# EAGLE board logic (EAGLE 9.6.2)
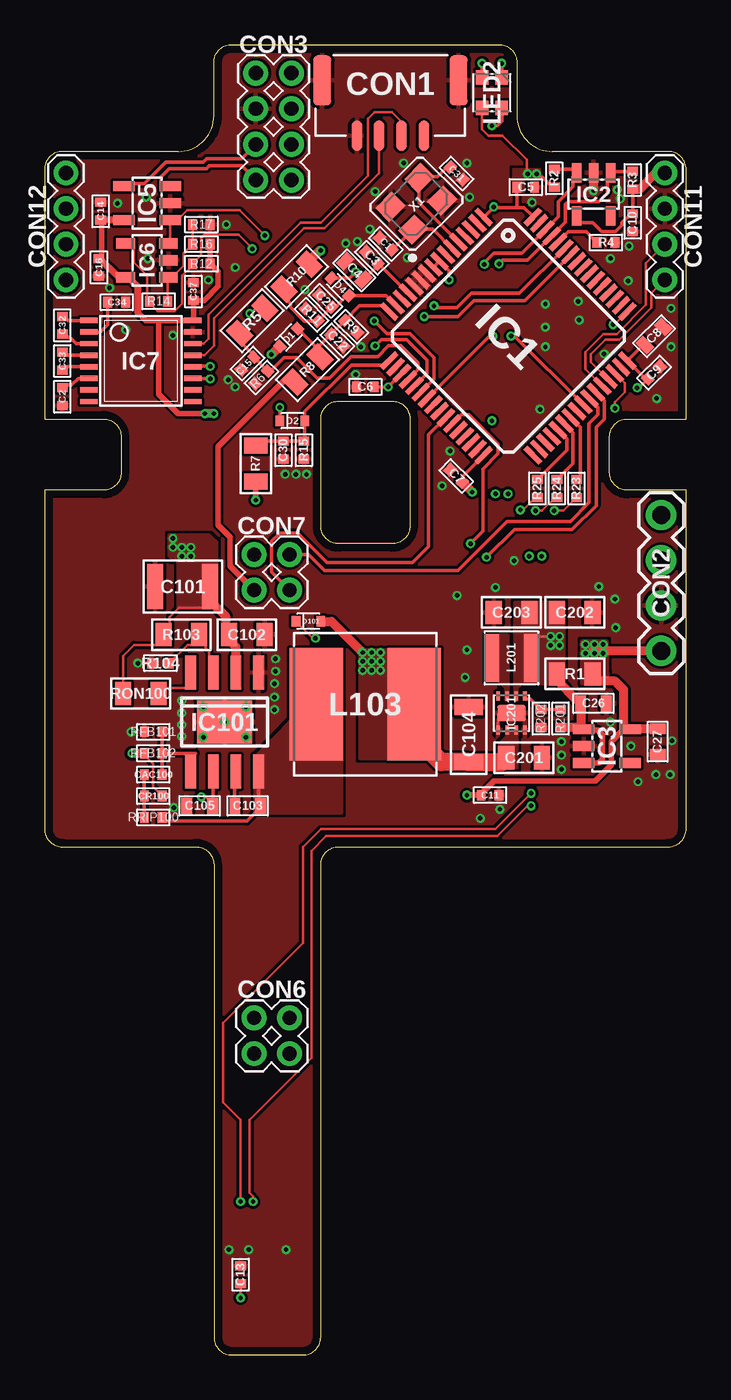
[diagram p0: board, top side]
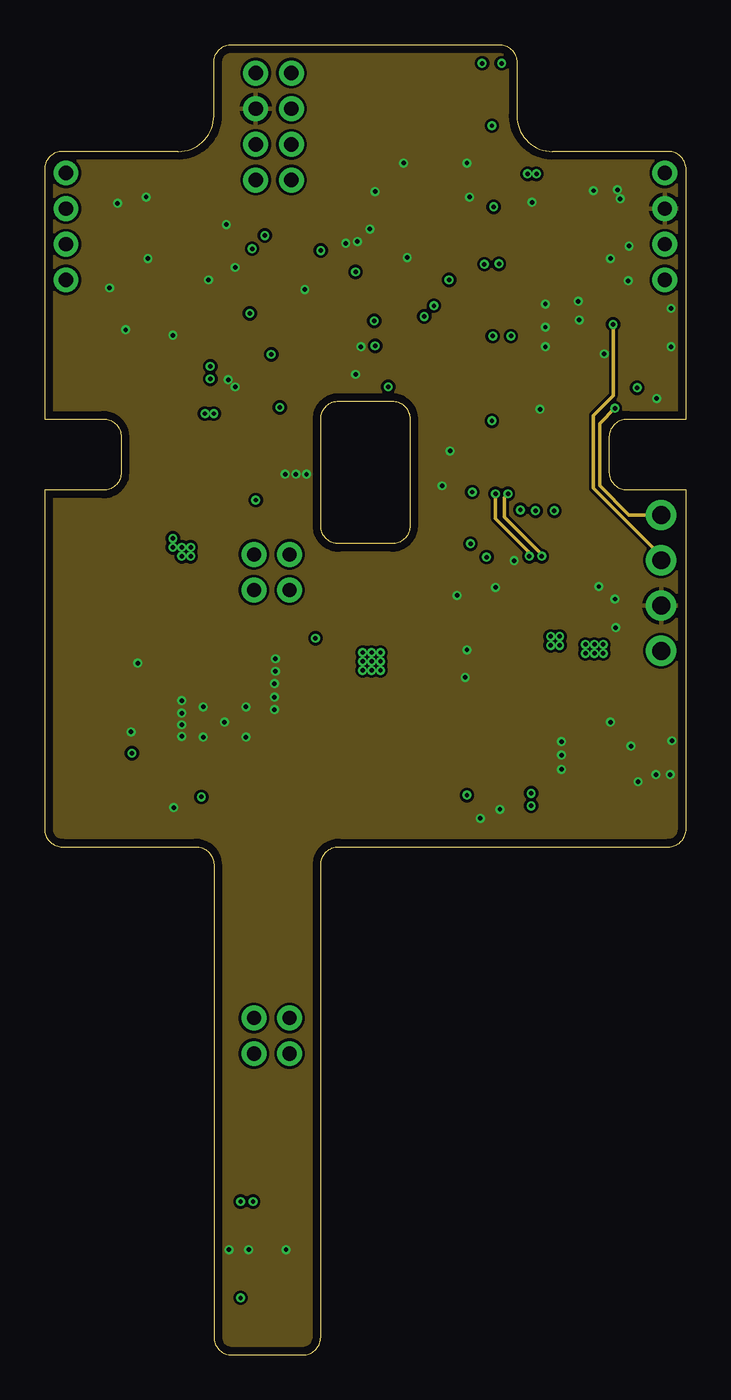
[diagram p1: board, inner layer GND]
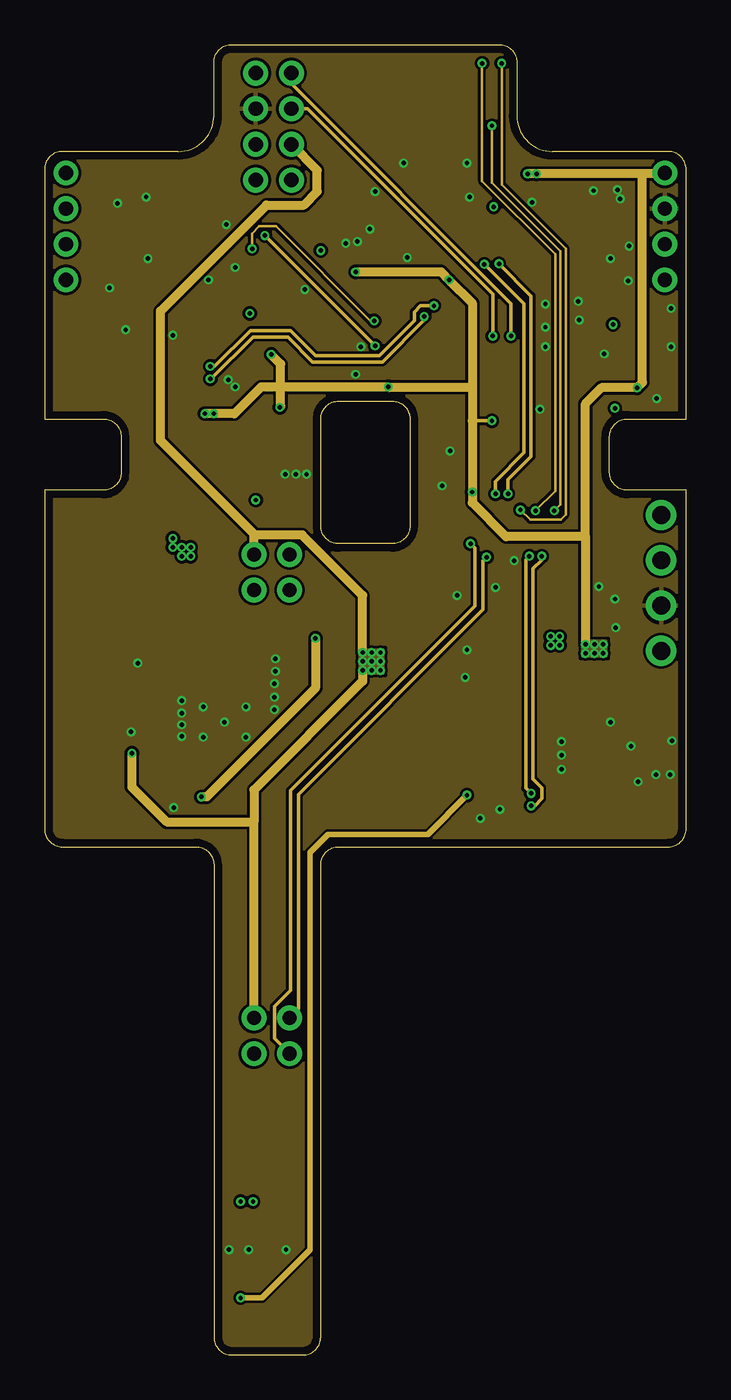
[diagram p2: board, inner layer PWR]
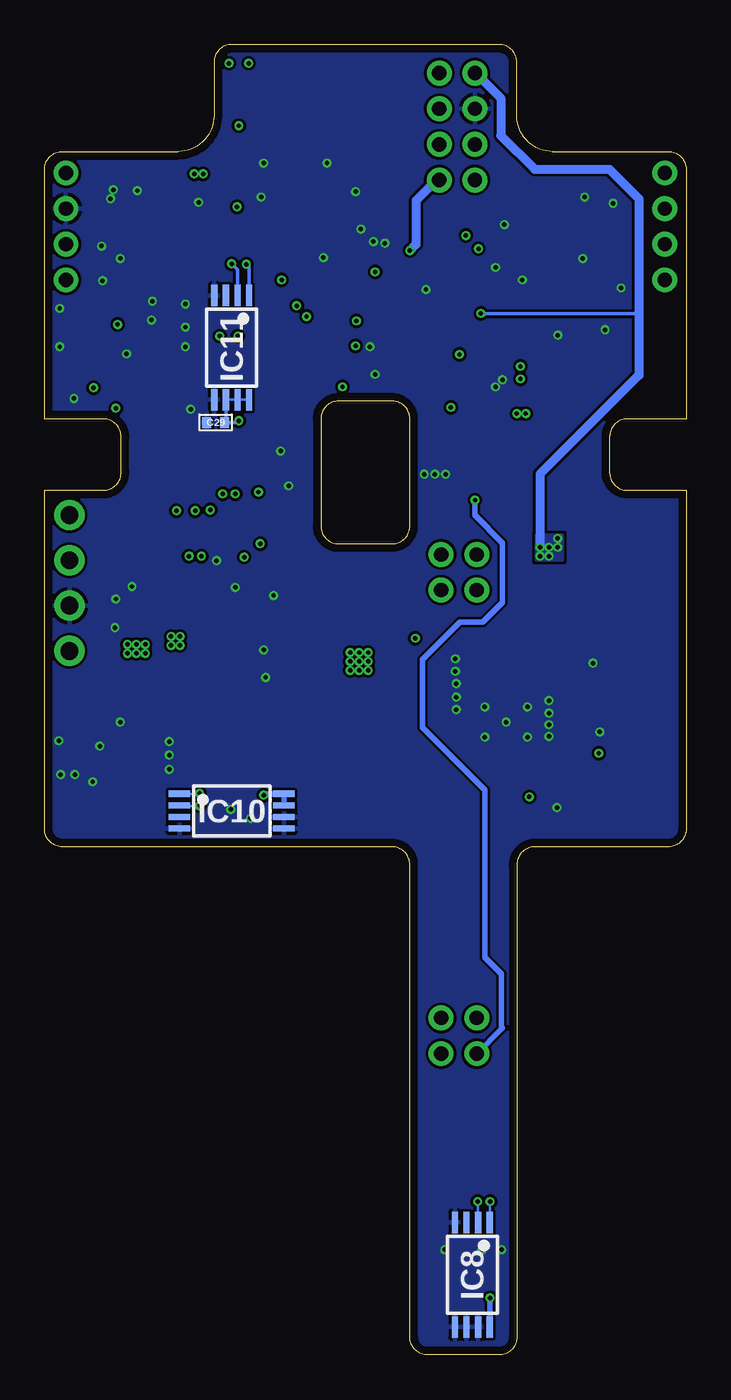
[diagram p3: board, bottom side, seen from below]

Size 36 x 73.5 mm. Coordinates in mm from the lower left corner, seen from the top.
Outline: 9.5,69.5 9.5,72.5 arc-90 10.5,73.5 25.5,73.5 arc-90 26.5,72.5 26.5,69.5 arc90 28.5,67.5 35,67.5 arc-90 36,66.5 36,52.5 32.7,52.5 arc90 31.7,51.5 31.7,49.5 arc90 32.7,48.5 36,48.5 36,29.5 arc-90 35,28.5 16.5,28.5 arc90 15.5,27.5 15.5,1 arc-90 14.5,0 10.5,0 arc-90 9.5,1 9.5,27.5 arc90 8.5,28.5 1,28.5 arc-90 0,29.5 0,48.5 3.3,48.5 arc90 4.3,49.5 4.3,51.5 arc90 3.3,52.5 0,52.5 0,66.5 arc-90 1,67.5 7.5,67.5 arc90 9.5,69.5
Outline: 16.5,53.5 19.5,53.5 arc-90 20.5,52.5 20.5,46.5 arc-90 19.5,45.5 16.5,45.5 arc-90 15.5,46.5 15.5,52.5 arc-90 16.5,53.5
Copper layers (1+2*15+16): Top 0.035mm / dielectric 0.11mm / GND 0.035mm / dielectric 0.73mm / PWR 0.035mm / dielectric 0.11mm / Bottom 0.035mm
Design rules "logicpcb *": minimum track width 0.15mm, minimum drill 0.2mm, track to track 0.15mm, track to pad 0.15mm, pad to pad 0.15mm, via to via 0.15mm, smd to smd 0.15mm, copper to edge 0.45mm, drill to drill 0.2mm, minimum pad ring 0.125mm, minimum via ring 0.125mm, stop-mask expansion 1mil, vias tented up to drill 0.31mm, thermal gap 8mil
Net classes: 1 HV: clearance 0.5 mm

## Footprints (pad centres in the part's own frame; a part is rotated, then mirrored left to right if it is on the bottom)
C0402 = smd 0.5 x 0.6: 1 -0.5,0; 2 0.5,0
C0603 = smd 0.6 x 0.9: 1 -0.725,0; 2 0.725,0
C1210 = smd 0.9 x 2.5: 1 -1.55,0; 2 1.55,0
C0805 = smd 0.9 x 1.3: 1 -1,0; 2 1,0
C1206 = smd 0.9 x 1.6: P$1 -1.55,0; P$2 1.55,0
JST_GH-4P-RA = smd 0.6 x 1.7: 1 1.875,-2.91; 2 0.625,-2.91; 3 -0.625,-2.91; 4 -1.875,-2.91 | smd 1 x 2.8: M$0 -3.825,0.19; M$1 3.825,0.19
1X04-PTH-2.54 = drill 1 pad 1.7: 1 -3.81,0; 2 -1.27,0; 3 1.27,0; 4 3.81,0
2X04-PTH-2 = drill 0.8 pad 1.4: 1 -1,3; 2 1,3; 3 -1,1; 4 1,1; 5 -1,-1; 6 1,-1; 7 -1,-3; 8 1,-3
2X02-PTH-2 = drill 0.8 pad 1.4: 1 -1,1; 2 1,1; 3 -1,-1; 4 1,-1
1X04-PTH-2 = drill 0.8 pad 1.4: 1 -3,0; 2 -1,0; 3 1,0; 4 3,0
SOD523 = smd 0.5 x 0.6: A -0.7,0; C 0.7,0
TQFP64 = smd 1.2 x 0.3: 1 -5.7,3.75; 2 -5.7,3.25; 3 -5.7,2.75; 4 -5.7,2.25; 5 -5.7,1.75; 6 -5.7,1.25; 7 -5.7,0.75; 8 -5.7,0.25; 9 -5.7,-0.25; 10 -5.7,-0.75; 11 -5.7,-1.25; 12 -5.7,-1.75; 13 -5.7,-2.25; 14 -5.7,-2.75; 15 -5.7,-3.25; 16 -5.7,-3.75; 33 5.7,-3.75; 34 5.7,-3.25; 35 5.7,-2.75; 36 5.7,-2.25; 37 5.7,-1.75; 38 5.7,-1.25; 39 5.7,-0.75; 40 5.7,-0.25; 41 5.7,0.25; 42 5.7,0.75; 43 5.7,1.25; 44 5.7,1.75; 45 5.7,2.25; 46 5.7,2.75; 47 5.7,3.25; 48 5.7,3.75 | smd 0.3 x 1.2: 17 -3.75,-5.7; 18 -3.25,-5.7; 19 -2.75,-5.7; 20 -2.25,-5.7; 21 -1.75,-5.7; 22 -1.25,-5.7; 23 -0.75,-5.7; 24 -0.25,-5.7; 25 0.25,-5.7; 26 0.75,-5.7; 27 1.25,-5.7; 28 1.75,-5.7; 29 2.25,-5.7; 30 2.75,-5.7; 31 3.25,-5.7; 32 3.75,-5.7; 49 3.75,5.7; 50 3.25,5.7; 51 2.75,5.7; 52 2.25,5.7; 53 1.75,5.7; 54 1.25,5.7; 55 0.75,5.7; 56 0.25,5.7; 57 -0.25,5.7; 58 -0.75,5.7; 59 -1.25,5.7; 60 -1.75,5.7; 61 -2.25,5.7; 62 -2.75,5.7; 63 -3.25,5.7; 64 -3.75,5.7
SOT23-5L = smd 0.6 x 1.1: 1 -0.95,-1.2; 2 0,-1.2; 3 0.95,-1.2; 4 0.95,1.2; 5 -0.95,1.2
SOT23-5 = smd 0.55 x 1.2: 1 -0.95,-1.3; 2 0,-1.3; 3 0.95,-1.3; 4 0.95,1.3; 5 -0.95,1.3
TSSOP16 = smd 0.991 x 0.305: 1 -2.918,2.275; 2 -2.918,1.625; 3 -2.918,0.975; 4 -2.918,0.325; 5 -2.918,-0.325; 6 -2.918,-0.975; 7 -2.918,-1.625; 8 -2.918,-2.275; 9 2.918,-2.275; 10 2.918,-1.625; 11 2.918,-0.975; 12 2.918,-0.325; 13 2.918,0.325; 14 2.918,0.975; 15 2.918,1.625; 16 2.918,2.275
TSSOP8 = smd 1.2 x 0.35: 1 -2.925,0.975; 2 -2.925,0.325; 3 -2.925,-0.325; 4 -2.925,-0.975; 5 2.925,-0.975; 6 2.925,-0.325; 7 2.925,0.325; 8 2.925,0.975
SOIC8-POWERPAD = smd 1.9 x 0.6: 1 -2.78,1.905; 2 -2.78,0.635; 3 -2.78,-0.635; 4 -2.78,-1.905; 5 2.78,-1.905; 6 2.78,-0.635; 7 2.78,0.635; 8 2.78,1.905 | smd 2.4 x 3.1: P$1 0,0
WFDFN-8 = smd 0.5 x 0.25: 1 -0.95,0.75; 2 -0.95,0.25; 3 -0.95,-0.25; 4 -0.95,-0.75; 5 0.95,-0.75; 6 0.95,-0.25; 7 0.95,0.25; 8 0.95,0.75 | smd 0.9 x 1.6: EP 0,0
HPC8040NF = smd 3 x 6.3: 1 -2.75,0; 2 2.75,0
NR3015 = smd 0.8 x 2.7: 1 -1.1,0; 2 1.1,0
LED2020 = smd 0.8 x 0.7: + -0.85,0.55; B -0.85,-0.55; G 0.85,0.55; R 0.85,-0.55
R0805 = smd 0.9 x 1.3: 1 -1,0; 2 1,0
R0402 = smd 0.5 x 0.6: 1 -0.5,0; 2 0.5,0
OSCILLATOR-3.2X2.5-4P = smd 1.3 x 1.1: 1 -1.15,-0.9; 2 1.15,-0.9; 3 1.15,0.9; 4 -1.15,0.9

## Placement (x,y rotation side)
C1  18pF  [C0402]  19.15,62.32 315 top
C2  0.1µF  [C0402]  1,53.75 270 top
C3  10nF  [C0402]  18.37,61.54 315 top
C4  1µF  [C0603]  17.38,60.83 315 top
C5  0.1µF  [C0402]  27,65.5 180 top
C6  0.1µF  [C0402]  18,54.3 0 top
C7  0.1µF  [C0402]  23.1,49.3 315 top
C8  4.7µF  [C0603]  34.2,57.15 45 top
C9  0.1µF  [C0402]  34.2,55.1 45 top
C10  0.1µF  [C0402]  33,63.5 270 top
C11  0.1µF  [C0402]  25,31.4 0 top
C13  0.1µF  [C0402]  11,4.5 90 top
C14  0.1µF  [C0402]  3.15,64.15 90 top
C15  0.1µF  [C0402]  11.39,55.61 45 top
C16  0.1µF  [C0402]  3.05,61 90 top
C22  1800pF  [C0402]  16.43,56.9 135 top
C25  1800pF  [C0402]  15.76,59.12 315 top
C26  1µF  [C0603]  30.8,36.55 180 top
C27  4.7µF  [C0603]  34.4,34.4 90 top
C29  0.1µF  [C0402]  26.4,52.3 180 bottom
C30  1800pF  [C0402]  13.4,50.75 90 top
C31  18pF  [C0402]  23.12,66.27 135 top
C32  0.1µF  [C0402]  1,57.75 270 top
C33  0.1µF  [C0402]  1,55.75 90 top
C34  0.1µF  [C0402]  4.05,59.05 0 top
C37  0.1µF  [C0402]  8.35,59.65 270 top
C101  2.2uF  [C1210]  7.75,43.1 0 top
C102  0.47uF  [C0805]  11.35,40.4 180 top
C103  0.01uF  [C0603]  11.4,30.8 0 top
C104  10uF  [C1206]  23.8,34.8 270 top
C105  1uf  [C0603]  8.7,30.8 0 top
C201  10uF  [C0805]  26.9,33.5 180 top
C202  10uF  [C0805]  29.75,41.65 180 top
C203  10uF  [C0805]  26.2,41.65 0 top
CAC100  0.1uF  [C0402]  6.1,32.55 180 top
CON1  CON-4P-TABS-JST_GH-RA  [JST_GH-4P-RA]  19.4,71.3 0 top
CON2  PINHEAD_1X04-2.54  [1X04-PTH-2.54]  34.6,43.3 270 top
CON3  PINHEAD_2X04-PLS-2  [2X04-PTH-2]  12.85,68.9 0 top
CON6  PINHEAD_2X02-PTH-2-MALE  [2X02-PTH-2]  12.75,17.9 0 top
CON7  PINHEAD_2X02-PTH-2-MALE  [2X02-PTH-2]  12.75,43.9 0 top
CON11  PINHEAD_1X04-2  [1X04-PTH-2]  34.8,63.3 270 top
CON12  PINHEAD_1X04-2  [1X04-PTH-2]  1.2,63.3 90 top
CR100  3300pF  [C0402]  6.1,31.35 180 top
D1  BAT54KFILM  [SOD523]  13.7,57.07 225 top
D2  BAT54KFILM  [SOD523]  13.9,52.4 180 top
D4  BAT54KFILM  [SOD523]  16.58,59.91 135 top
D101  PMEG3005  [SOD523]  14.8,41.15 180 top
IC1  STM32F105RCT6  [TQFP64]  26.02,57.15 315 top
IC2  CAT24C02  [SOT23-5L]  30.8,65.1 180 top
IC3  AP2127-3.3  [SOT23-5]  31.55,34.15 270 top
IC5  INA180A2  [SOT23-5]  5.75,64.6 90 top
IC6  LMV331  [SOT23-5L]  5.75,61.4 90 top
IC7  ST3232  [TSSOP16]  5.4,55.75 0 top
IC8  LM75-TSSOP8  [TSSOP8]  12,4.5 270 bottom
IC10  LM75-TSSOP8  [TSSOP8]  25.5,30.5 0 bottom
IC11  LM75-TSSOP8  [TSSOP8]  25.5,56.5 270 bottom
IC101  LM5017  [SOIC8-POWERPAD]  10.1,35.5 270 top
IC201  TPS62160QDSGRQ1  [WFDFN-8]  26.2,36 90 top
L103  120µH  [HPC8040NF]  18,36.5 0 top
L201  2.2µH  [NR3015]  26.2,39.1 0 top
LED2  LED_RGB-2020  [LED2020]  25.1,70.8 90 top
R1  000  [R0805]  29.75,38.2 0 top
R2  3K9  [R0402]  28.6,66 90 top
R3  3K9  [R0402]  33,65.9 90 top
R4  3K9  [R0402]  31.5,62.4 180 top
R5  [R0805]  11.64,58.01 45 top
R6  [R0402]  12.17,54.83 45 top
R7  4K7  [R0805]  11.85,50 90 top
R8  4K7  [R0805]  14.75,55.27 45 top
R9  560R  [R0402]  17.21,57.67 135 top
R10  4K7  [R0805]  14.14,60.48 225 top
R11  560R  [R0402]  14.98,58.35 315 top
R12  3K9  [R0402]  8.8,61.2 180 top
R14  DNM  [R0402]  6.4,59.1 0 top
R15  560R  [R0402]  14.55,50.75 90 top
R16  000  [R0402]  8.8,62.3 0 top
R17  000  [R0402]  8.8,63.4 0 top
R23  200R  [R0402]  29.85,48.6 90 top
R24  200R  [R0402]  28.75,48.6 90 top
R25  200R  [R0402]  27.65,48.6 90 top
R103  127K  [R0805]  7.68,40.4 180 top
R104  14K  [R0402]  6.5,38.8 0 top
R201  51K  [R0402]  28.95,35.7 270 top
R202  10K  [R0402]  27.85,35.7 90 top
RFB101  1K  [R0402]  6.1,34.95 0 top
RFB102  3K  [R0402]  6.1,33.75 180 top
RON100  110K  [R0805]  5.4,37.1 0 top
RRIP100  110K  [R0402]  6.1,30.15 0 top
X1  16MHz  [OSCILLATOR-3.2X2.5-4P]  20.86,64.57 45 top

## Library data of the parts
C1 C31 = rc; AEC-Q: ---; DIGIKEY#: 399-8828-1-ND; MANF: Kemet; MANF#: CBR04C180F5GAC; OPERATING_TEMP: -55°C ~ 125°C; PACKAGE: 0402; VOLTAGE: 50V
C2 C5-C7 C9 C11 C13-C16 C29 C32-C34 C37 = rc; AEC-Q: ---; DIGIKEY#: 490-3261-1-ND; MANF: Murata Electronics; MANF#: GRM155R71C104KA88D; OPERATING_TEMP: -55°C ~ 125°C; PACKAGE: 0402; VOLTAGE: 16V
C3 = rc; AEC-Q: ---; DIGIKEY#: 490-6043-1-ND; MANF: Murata Electronics; MANF#: GCM155R71E103KA37D; OPERATING_TEMP: -55°C ~ 125°C; PACKAGE: 0402; VOLTAGE: 25V
C4 C26 = rc; AEC-Q: AEC-Q200; DIGIKEY#: 445-12539-1-ND; MANF: TDK Corporation; MANF#: CGA3E1X7R1C105K080AC; OPERATING_TEMP: -55°C ~ 125°C; PACKAGE: 0603; VOLTAGE: 16V
C8 C27 = rc; AEC-Q: ---; DIGIKEY#: 1276-2087-1-ND; MANF: Samsung Electro-Mechanics; MANF#: CL10B475KQ8NQNC; OPERATING_TEMP: -55°C ~ 125°C; PACKAGE: 0603; VOLTAGE: 6.3V
C10 = C_digikey; DIGIKEY#: 490-3261-1-ND; MANF: Murata Electronics North America; MANF#: GRM155R71C104KA88D; OPERATING_TEMP: -55°C ~ 125°C; PACKAGE: 0402; TC: X7R; TOLERANCE: +-10%; VOLTAGE: 16V
C22 C25 C30 CAC100 CR100 = rc; PACKAGE: 0402
C101 = rc; PACKAGE: 1210; VOLTAGE: 100V
C102 = rc; PACKAGE: 0805; VOLTAGE: 100V
C103 = rc; PACKAGE: 0603; VOLTAGE: 25V
C104 = rc; PACKAGE: 1206; VOLTAGE: 16V
C105 = rc; PACKAGE: 0603; VOLTAGE: 16V
C201-C203 = rc; AEC-Q: AEC-Q200; DIGIKEY#: 445-181411-1-ND; MANF: TDK Corporation; MANF#: CGA4J1X7S1E106K125AE; PACKAGE: 0805; VOLTAGE: 25V
CON1 = Connectors; DIGIKEY#: 455-1566-1-ND; MANF: JST Sales America Inc; MANF#: SM04B-GHS-TB(LF)(SN)
CON2 CON3 CON6 CON7 CON11 CON12 = pinhead
D1 D2 D4 = Diodes; DIGIKEY#: STMicroelectronics; LCSC#: C283259; MANF: STMicroelectronics; MANF#: BAT54KFILM
D101 = Diodes; DIGIKEY#: 1727-5831-1-ND; MANF: Nexperia USA Inc; MANF#: PMEG3005EB,115
IC1 = stm32; DIGIKEY#: 497-11547-ND; LCSC#: C8345; MANF: STMicroelectronics; MANF#: STM32F105RCT7; OPERATING_TEMP: -40°C ~ 105°C (TA)
IC2 = misc; DIGIKEY#: CAT24C02TDI-GT3AOSCT-ND; MANF: ON Semiconductor; MANF#: CAT24C02TDI-GT3A
IC3 = linear regulators; DIGIKEY#: AP2127K-3.3TRG1DITR-ND; I_MAX: 300mA; LCSC#: C156285; MANF: Diodes Incorporated; MANF#: AP2127K-3.3TRG1; V_MAX: 6V
IC5 = misc; DIGIKEY#: 296-47653-1-ND; GAIN: 50V/V; LCSC#: C192764; MANF: Texas Instruments; MANF#: INA180A2IDBVR
IC6 = misc; LCSC#: C108095; MANF: 3PEAK; MANF#: LMV331TP-TR
IC7 = serial_interfaces; DIGIKEY#: 497-6534-1-ND; LCSC#: C435947; MANF: STMicroelectronics; MANF#: ST3232BTR
IC8 IC10 IC11 = misc; DIGIKEY#: 568-4768-1-ND; LCSC#: C33099; MANF: NXP Semiconductors; MANF#: LM75BDP,118
IC101 = dc-dc; DIGIKEY#: 296-37695-1-ND; DIGIREEL#: 296-37695-6-ND; LCSC#: C34355; MANF: Texas Instruments; MANF#: LM5017MRE/NOPB
IC201 = dc-dc; AEC-Q: AEC-Q100; DIGIKEY#: 296-40840-1-ND; LCSC#: C324077; MANF: Texas Instruments; MANF#: TPS62160QDSGRQ1
L103 = power_inductors; CURRENT: 1A; DCR: 350mΩ; HEIGHT: 3.7mm; LCSC#: C357080; MANF: TAI-TECH; MANF#: HPC8040NF-121M
L201 = power_inductors; AEC-Q: AEC-Q200; CURRENT: 1.5A; DIGIKEY#: 587-3561-1-ND; HEIGHT: 1.5mm; MANF: Taiyo Yuden; MANF#: NRS3015T2R2MNGHV
LED2 = rc; LCSC#: C108793; MANF: Foshan NationStar Optoelectronics; MANF#: FM-B2020RGBA-HG
R1 R5 R7 R8 R10 R103 RON100 = rc; PACKAGE: 0805; TOLERANCE: 1%
R2-R4 R12 R14 R16 R17 = rc; AEC-Q: ---; DIGIKEY#: 311-3.90KLRCT-ND; MANF: Yageo; MANF#: RC0402FR-073K9L; OPERATING_TEMP: -55°C ~ 155°C; PACKAGE: 0402; TOLERANCE: 1%
R6 R9 R11 R15 R104 RFB101 RFB102 RRIP100 = rc; PACKAGE: 0402; TOLERANCE: 1%
R23-R25 = rc; AEC-Q: ---; DIGIKEY#: 311-200JRCT-ND; MANF: Yageo; MANF#: RC0402JR-07200RL; OPERATING_TEMP: -55°C ~ 155°C; PACKAGE: 0402; TOLERANCE: 1%
R201 = rc; AEC-Q: AEC-Q200; DIGIKEY#: P51.0KLCT-ND; MANF: Panasonic Electronic Components; MANF#: ERJ-2RKF5102X; PACKAGE: 0402; TOLERANCE: 1%
R202 = rc; AEC-Q: AEC-Q200; DIGIKEY#: P10.0KLCT-ND; MANF: Panasonic Electronic Components; MANF#: ERJ-2RKF1002X; PACKAGE: 0402; TOLERANCE: 1%
X1 = crystal; DIGIKEY#: 1253-1198-1-ND; MANF: AVX Corp/Kyocera Corp; MANF#: CX3225GB24000P0HPQCC

## Nets
BOOT0: IC1.60 R4.2
CAN1_RX: CON11.3 IC1.44
CAN1_TX: CON11.4 IC1.45
CS+: CON3.7 IC5.3
CS-: CON3.5 IC5.4
CURRENT_AMP_OUT: IC1.21 IC5.1 IC6.3
FET_A_H: CON3.2 IC1.41
FET_A_L: CON3.4 IC1.23
FET_B_H: CON7.2 IC1.42
FET_B_L: CON7.4 IC1.26
FET_C_H: CON6.2 IC1.43
FET_C_L: CON6.4 IC1.27
GND: C1.1 C2.2 C3.1 C4.1 C5.1 C6.1 C7.1 C8.2 C9.2 C10.2 C11.2 C13.2 C14.2 C15.1 C16.1 C22.1 C25.1 C26.1 C27.1 C29.2 C30.1 C31.1 C34.2 C37.1 C101.1 C102.1 C104.P$1 C105.1 C201.1 C202.1 C203.1 CON1.4 CON1.M$0 CON1.M$1 CON2.3 CON3.3 CON11.2 IC1.10 IC1.11 IC1.12 IC1.18 IC1.31 IC1.47 IC1.63 IC2.2 IC3.2 IC5.2 IC6.2 IC7.15 IC8.4 IC8.5 IC8.6 IC8.7 IC10.4 IC10.5 IC10.6 IC11.4 IC11.5 IC101.1 IC101.P$1 IC201.1 IC201.4 IC201.EP R4.1 R6.1 R9.1 R11.1 R15.1 R17.2 R104.1 R202.1 RFB101.1 X1.2 X1.4
HV_DC-DC(LM5017):N$2: C103.2 IC101.8 L103.1 RRIP100.2
HV_DC-DC(LM5017):N$3: CAC100.2 CR100.2 RRIP100.1
HV_DC-DC(LM5017):N$10: C105.2 D101.C IC101.6
HV_DC-DC(LM5017):N$11: IC101.4 RON100.2
HV_DC-DC(LM5017):N$12: C103.1 IC101.7
HV_DC-DC(LM5017):N$14: CAC100.1 IC101.5 RFB101.2 RFB102.1
HV_DC-DC(LM5017):N$17: IC101.3 R103.1 R104.2
I2C_SCL: IC1.61 IC2.1 IC8.2 IC10.2 IC11.2 R3.2
I2C_SDA: IC1.62 IC2.3 IC8.1 IC10.1 IC11.1 R2.2
LV_DC-DC:FB: IC201.5 R201.1 R202.2
LV_DC-DC:N$1: IC201.7 L201.1
N$2: IC6.1 R14.2 R16.1 R17.1
N$3: IC1.37 R25.2
N$6: LED2.B R23.1
N$7: LED2.R R25.1
N$12: IC1.38 R24.2
N$16: C31.2 IC1.5 X1.3
N$18: IC1.39 R23.2
N$19: C32.1 IC7.1
N$20: C32.2 IC7.3
N$21: C1.2 IC1.6 X1.1
N$22: C33.1 IC7.5
N$24: C33.2 IC7.4
N$26: LED2.G R24.1
N$27: C2.1 IC7.6
N$28: C34.1 IC7.2
N$29: CON1.3 IC7.13
N$30: CON1.2 IC7.14
OVERCURRENT_FAULT: IC1.22 IC6.4 R12.2 R14.1
PHASE_A [HV]: CON3.8 R10.1
PHASE_B [HV]: CON7.3 R8.1
PHASE_C [HV]: CON6.3 R7.1
RC_PWM: IC1.14
RCPWM: CON1.1
SENSE_A: C25.2 D4.A IC1.15 R10.2 R11.2
SENSE_B: C22.2 D1.A IC1.16 R8.2 R9.2
SENSE_C: C30.2 D2.A IC1.17 R7.2 R15.2
SENSE_VIN: C15.2 IC1.20 R5.1 R6.2
SWCLK: CON2.2 IC1.49
SWDIO: CON2.1 IC1.46
TSENS_OS: IC1.56
USART1_RX: IC1.59 IC7.12
USART1_TX: IC1.58 IC7.11
VDC [HV]: C101.2 C102.2 CON3.1 IC101.2 R5.2 R103.2 RON100.1
VDD_3V3: C3.2 C4.2 C5.2 C6.2 C7.2 C8.1 C9.1 C10.1 C11.1 C13.1 C14.1 C16.2 C27.2 C29.1 C37.2 CON2.4 CON11.1 D1.C D2.C D4.C IC1.1 IC1.8 IC1.9 IC1.13 IC1.19 IC1.32 IC1.48 IC1.64 IC2.4 IC3.5 IC5.5 IC6.5 IC7.16 IC8.8 IC10.7 IC10.8 IC11.6 IC11.7 IC11.8 LED2.+ R1.2 R2.1 R3.1 R12.1 R16.2
VDD_5V: C26.2 C202.2 C203.2 IC3.1 IC3.3 IC201.6 L201.2 R1.1 R201.2
VDD_12V: C104.P$2 C201.2 CON3.6 CON6.1 CON7.1 CR100.1 D101.A IC201.2 IC201.3 L103.2 RFB102.2

## Tracks (layer width: path | path; a pad name or v marks a point on that pad's centre or on a via)
BOOT0
  Top 0.2: R4.2 30.4,63 29.4,63 IC1.60
CAN1_RX
  Top 0.15: IC1.44 30.35,55.29 30.35,56.25 31.35,57.25 32.1,57.25 33.75,58.9 33.75,61.25 CON11.3
CAN1_TX
  Top 0.15: IC1.45 30.65,55.7 30.65,56.13 31.47,56.95 32.25,56.95 34.05,58.75 34.05,59.55 CON11.4
CS+
  Top 0.2: CON3.7 11.05,66.7 9.24,66.7 9.1,66.55 7,66.55 6.55,66.1 6.55,65.55 IC5.3
CS-
  Top 0.2: CON3.5 11.05,67.1 9.1,67.1 8.9,66.9 6.8,66.9 5.6,65.7 4.6,65.7 IC5.4
CURRENT_AMP_OUT  (via drill 0.25, 0.25 pad 0.5)
  Top 0.15: IC5.1 7.45,63.65 8,64.2 10.95,64.2 v12.36,62.79
  Top 0.152: IC5.1 7.05,62.45 IC6.3
  Top 0.2: IC1.21 21.45,55.05 21.45,55.8 20.3,56.95 18.9,56.95 v18.55,56.6
  PWR 0.2: v18.55,56.6 v12.36,62.79
FET_A_H  (via drill 0.25)
  Top 0.2: IC1.41 26.37,57.15 v26.17,57.15
  PWR 0.2: v26.17,57.15 26.17,58.98 13.85,71.3 CON3.2
FET_A_L  (via drill 0.25)
  Top 0.2: IC1.23 24.96,57.15 v25.15,57.15
  PWR 0.2: CON3.4 14.75,69.9 25.15,59.5 v25.15,57.15
FET_B_H
  Top 0.2: IC1.42 31.05,53.18 31.05,52.75 30.55,52.25 30.55,47.8 29.5,46.75 25.95,46.75 23.2,44 15.7,44 14.8,44.9 CON7.2
FET_B_L
  Top 0.2: IC1.26 21.55,51.62 21.55,45.35 20.65,44.45 15.85,44.45 14.2,46.1 13.2,46.1 12.75,45.65 12.75,43.9 CON7.4
FET_C_H  (via drill 0.25 pad 0.5)
  Top 0.2: IC1.43 31.4,53.53 31.4,52.5 30.95,52.05 30.95,47.65 29.6,46.3 26.35,46.3 v24.8,44.75
  PWR 0.2: CON6.2 14.25,19.4 14.25,31.45 24.6,41.8 24.6,44.55 v24.8,44.75
FET_C_L  (via drill 0.25 pad 0.5)
  Top 0.2: IC1.27 23.39,52.75 23.8,52.75 25.45,51.1 25.45,50.55 24.6,49.7 24.6,46.2 v23.9,45.5
  PWR 0.2: CON6.4 12.9,17.75 12.9,19.55 13.8,20.45 13.8,31.65 24.15,42 24.15,45.25 v23.9,45.5
GND  (via drill 0.25, 0.25 pad 0.5)
  Top 0.15: R104.1 v5.22,38.8 | IC201.1 25.47,35.98 IC201.EP
  Top 0.5: IC2.2 v30.8,65.31 v30.8,65.3
  other vias: 7.25,30.7 4.85,34.95 17.45,55 16.9,62.35 14.6,59.76 17.75,56.55 32.8,62.2 27.35,64.65 17.55,62.45 18.25,63.15 18.55,65.25 20.15,66.85 23.7,66.85 23.85,64.95 20.35,61.55 32.75,60.25 35.15,56.55 34.35,53.65 28.1,58.95 28.1,56.55 30,58.05 29.95,59.1 28.1,57.65 26.35,44.55 10.3,54.7 10.7,54.3 31.4,56.15 32.3,64.85 32.15,65.35 31.75,61.5 35.15,58.7 5.7,64.95 5.8,61.5 4.1,64.6 3.65,59.85 4.55,57.5 22.75,50.7 22.3,48.75 10.2,63.4 9.2,60.3 10.7,61 29,34.4 29,32.85 29,33.65 31.75,35.5 32.9,34.15 35.2,34.45 32,42.4 32.05,40.8 31.1,43.1 25.3,43.05 23.15,42.6 23.7,39.55 23.6,38 12.95,39.05 12.95,38.35 12.9,37.65 12.9,36.9 12.9,36.2 7.7,36.7 7.7,36 7.7,35.35 7.7,34.7 24.45,30.1 25.55,30.6 10.35,5.9 11.45,5.9 13.55,5.9 13.5,49.4 14.1,49.4 14.7,49.4 27.8,53.05 7.2,57.2 35.1,32.55 34.3,32.55 33.3,32.15 8.9,36.35 11.3,36.35 8.9,34.65 11.3,34.65 10.1,35.5
  pour Bottom (rank 3): 0,73.5 36,73.5 36,0 0,0
  pour Top (rank 2): 0,73.5 36,73.5 36,0 0,0
  pour GND (rank 3): 0,73.5 36,73.5 36,0 0,0
  pour PWR (rank 2): 0,73.5 36,73.5 36,0 0,0
HV_DC-DC(LM5017):N$2
  Top 0.2: RRIP100.2 6.6,30 6.65,29.95 11.35,29.95 12.12,30.73 C103.2 12,30.92 IC101.8
  pour Top (no thermals): 11.8,33.55 14.95,36.7 16.65,36.7 16.65,30.4 11.8,30.4
HV_DC-DC(LM5017):N$3
  Top 0.2: CAC100.2 CR100.2 RRIP100.1
HV_DC-DC(LM5017):N$10  (via drill 0.25)
  Top 0.15: C105.2 9.43,30.9 9.03,31.3 v8.8,31.3 | v15.2,40.2 15.12,40.12 D101.C
  Top 0.2: IC101.6 9.46,30.84 C105.2
  PWR 0.5: v8.8,31.3 9.1,31.3 15.2,37.4 v15.2,40.2
HV_DC-DC(LM5017):N$11
  Top 0.15: RON100.2 6.7,37.4 8,37.4 8.2,37.59 IC101.4
HV_DC-DC(LM5017):N$12
  Top 0.2: C103.1 10.68,32.66 IC101.7
HV_DC-DC(LM5017):N$14
  Top 0.2: CAC100.1 RFB102.1 | RFB102.1 RFB101.2 | IC101.5 8.2,33.48 8.46,33.75 RFB102.1
HV_DC-DC(LM5017):N$17
  Top 0.15: IC101.3 9.24,38.51 9.24,39.46 9.05,39.65 9.05,40.05 8.94,40.16 8.93,40.15 | 8.93,40.15 R103.1 | R104.2 8.03,39.83 8.6,39.83 8.93,40.15
I2C_SCL  (via drill 0.25 pad 0.5)
  Top 0.152: v11.7,8.6 11.7,8.9 11.5,9.1 11.5,13.2 14.97,16.67 14.97,28.27 15.8,29.1 25.4,29.1 27.1,30.8 v27.3,30.8
  Top 0.2: IC2.1 31.77,66.38 | R3.2 32.98,66.38 31.77,66.38 | 31.77,66.38 31.57,66.38 31.57,65.18 31.1,64.7 29.4,64.7 29.23,64.53 29.23,63.53 IC1.61 27.09,61.4 25.7,61.4 v25.5,61.2
  GND 0.2: v27.9,44.8 27.9,44.91 25.8,47.01 25.8,48.1 v26,48.3
  PWR 0.2: v27.3,30.8 27.5,30.8 27.9,31.2 27.9,31.81 27.4,32.31 27.4,44.1 27.9,44.6 v27.9,44.8 | v25.5,61.2 27.3,59.4 27.3,50.4 26,49.1 v26,48.3
  Bottom 0.152: IC8.2 11.68,8.57 v11.7,8.6 | IC10.2 28.4,30.8 v27.3,30.8
  Bottom 0.2: IC11.2 25.18,60.88 v25.5,61.2
I2C_SDA  (via drill 0.25 pad 0.5)
  Top 0.152: v11,8.6 11,13.2 10.03,14.17 10.03,18.63 14.5,23.1 14.5,28.5 15.5,29.5 25.3,29.5 v27.3,31.5
  Top 0.2: R2.2 29.7,66.5 29.85,66.35 IC2.3 29.65,66.1 29.65,65.52 28.84,64.7 28.84,63.83 28.12,63.12 IC1.62 26.78,61.8 25.2,61.8 24.68,61.28 v24.68,61.18
  GND 0.2: v27.2,44.8 27.2,45 25.3,46.9 v25.3,48.3
  PWR 0.2: v24.68,61.18 26.9,58.96 26.9,50.6 25.3,49 v25.3,48.3 | v27.3,31.5 27,31.8 27,44.6 v27.2,44.8
  Bottom 0.152: IC8.1 11.03,8.57 v11,8.6 | IC10.1 27.32,31.48 v27.3,31.5
  Bottom 0.2: IC11.1 24.52,61.03 v24.68,61.18
LV_DC-DC:FB
  Top 0.2: IC201.5 26.97,36.8 27.25,36.8 R202.2 R201.1
LV_DC-DC:N$1
  pour Top (no thermals): 25.9,36.75 25.9,37.4 25.45,37.85 24.8,37.85 24.8,40.35 26,40.35 26,36.75
N$2
  Top 0.15: IC6.1 7.15,60.45 7.8,61.1 7.8,61.8 R16.1
  Top 0.152: R14.2 6.9,60.4 IC6.1 | R16.1 R17.1
N$3
  Top 0.2: IC1.37 29.3,51.39 29.3,50.75 R25.2
N$6  (via drill 0.25)
  Top 0.15: R23.1 29.1,47.35 v28.6,47.35
  Top 0.2: LED2.B 25.65,69.2 25.4,68.95 v25.1,68.95
  PWR 0.15: v28.6,47.35 28.95,47.7 28.95,61.9 25.1,65.75 v25.1,68.95
N$7  (via drill 0.25, 0.25 pad 0.5)
  Top 0.15: R25.1 27.55,48.1 26.85,47.4 v26.7,47.4
  Top 0.2: LED2.R v25.65,72.45
  PWR 0.15: v26.7,47.4 27.25,46.85 28.96,46.85 29.25,47.14 29.25,62.05 25.65,65.65 v25.65,72.45
N$12
  Top 0.2: IC1.38 29.65,51.75 29.65,50 R24.2
N$16
  Top 0.2: IC1.5 21,64.64 21,65.99 X1.3 21.11,66.1 22.04,66.1 22.57,66.62 C31.2
N$18
  Top 0.2: R23.2 30.05,49.3 30.05,52.05 IC1.39
N$19
  Top 0.2: C32.1 1.11,58.25 1.33,58.03 IC7.1
N$20
  Top 0.2: IC7.3 1.77,56.73 1.4,57.1 1.15,57.1 C32.2
N$21
  Top 0.2: IC1.6 21.78,63.15 20.71,63.15 X1.1 20.66,63.12 C1.2
N$22
  Top 0.2: IC7.5 1.27,55.42 1.1,55.25 C33.1
N$24
  Top 0.2: IC7.4 1.18,56.08 C33.2
N$26  (via drill 0.25)
  Top 0.15: v27.55,47.35 27.9,47.35 28.65,48.1 R24.1
  Top 0.2: LED2.G v24.55,72.45
  PWR 0.15: v27.55,47.35 28.65,48.45 28.65,61.75 24.55,65.85 v24.55,72.45
N$27
  Top 0.2: IC7.6 1.88,54.77 1.5,54.4 1.15,54.4 C2.1
N$28
  Top 0.2: IC7.2 3.12,57.38 3.55,57.8 C34.1
N$29
  Top 0.15: CON1.3 18.77,66.28 15.7,63.2 14.55,63.2 9.5,58.15 9.5,56.6 8.97,56.08 IC7.13
N$30
  Top 0.15: CON1.2 20.02,69.17 19.5,69.7 18.5,69.7 18.15,69.35 18.15,66.15 15.5,63.5 14.35,63.5 9.2,58.35 9.2,57 8.93,56.73 IC7.14
OVERCURRENT_FAULT  (via drill 0.25 pad 0.5)
  Top 0.15: R14.1 5.9,59 6.35,58.55 7.3,58.55 7.72,58.97 7.72,60.53 8.3,61.1 R12.2 8.78,61.67 8.78,62.64 8.96,62.83 10.89,62.83 11.65,62.07 v11.65,62.05
  Top 0.152: R14.1 5.75,59.25 5.75,60.55 5,61.3 5,62.3 4.95,62.35 IC6.4
  Top 0.2: IC1.22 21.85,54.75 21.85,55.95 20.5,57.3 19.2,57.3 v18.5,58
  PWR 0.15: v11.65,62.05 11.65,62.9 12.05,63.3 12.98,63.3 18.28,58 v18.5,58
PHASE_A  (via drill 0.25 pad 0.5)
  Top 0.5: R10.1 14.85,61.35 15.45,61.95 v15.5,61.95
  Bottom 0.5: v15.5,61.95 15.15,62.3 15.15,64.75 14,65.9 CON3.8
PHASE_B
  Top 0.3: R8.1 13.84,54.76 13.54,54.76 9.73,50.95 9.73,46.53 10.4,45.87 10.4,44.25 CON7.3
PHASE_C  (via drill 0.25 pad 0.5)
  Top 0.3: v11.85,47.95 R7.1
  Bottom 0.3: CON6.3 10.38,18.27 | 10.38,18.27 10.3,18.35 | v11.85,47.95 11.85,47.1 10.3,45.55 10.3,42.7 10.3,42.2 11.4,41.1 12.7,41.1 14.8,39 14.8,35.2 11.3,31.7 11.3,22.3 10.38,21.38 10.38,18.27
SENSE_A
  Top 0.2: R10.2 13.43,59.33 13.79,58.97 13.79,58.76 14.56,57.99 R11.2 C25.2 16.31,58.77 16.96,59.41 D4.A 19.16,59.41 IC1.15
SENSE_B
  Top 0.2: IC1.16 19.01,58.85 17.68,58.85 R9.2 C22.2 15.16,56.33 15.16,56.28 R8.2 15.46,56.3 D1.A
SENSE_C
  Top 0.2: IC1.17 19.09,55.52 17.22,55.52 14.6,52.9 D2.A 14.6,51.3 R15.2 C30.2 12.1,51.25 R7.2
SENSE_VIN
  Top 0.2: IC1.20 20.95,55.26 20.95,55.66 20,56.6 19.3,56.6 18.7,56 17.2,56 16,54.8 15.29,54.8 14.15,55.94 13.45,55.94 12.61,55.1 R6.2 C15.2 11.74,56.06 10.94,56.87 R5.1
SWCLK  (via drill 0.25 pad 0.5)
  Top 0.15: IC1.49 31.97,57.8 v31.9,57.8
  GND 0.2: v31.9,57.8 31.9,53.8 30.8,52.7 30.8,48.61 34.6,44.8 CON2.2
SWDIO  (via drill 0.25 pad 0.5)
  Top 0.15: v32,53.1 32,53.45 32.55,54 32.55,54.51 IC1.46
  GND 0.2: v32,53.1 31.14,52.24 31.14,48.76 32.79,47.11 CON2.1
USART1_RX  (via drill 0.25)
  Top 0.2: IC1.59 26.65,59.55 23.95,59.55 23.15,58.75 21.95,58.75 v21.85,58.85 | IC7.12 8.34,55.45 v9.3,55.45
  PWR 0.2: v9.3,55.45 9.55,55.45 11.55,57.45 13.81,57.45 15.21,56.05 18.79,56.05 20.75,58.01 20.75,58.5 21.1,58.85 v21.85,58.85
USART1_TX  (via drill 0.25)
  Top 0.2: IC1.58 26.96,59.15 24.6,59.15 24.1,59.15 23.2,58.25 v21.3,58.25 | IC7.11 9.28,54.77 v9.3,54.75
  PWR 0.2: v21.3,58.25 21.3,58.05 18.95,55.7 15.05,55.7 13.65,57.1 11.7,57.1 9.35,54.75 v9.3,54.75
VDC  (via drill 0.25 pad 0.5)
  Top 0.15: 9.3,42.1 9.12,41.92 7.55,41.92 7.03,41.4 7.03,40.75 R103.2 6.68,40.13 6.36,39.82 5.02,39.82 4.4,39.2 RON100.1 | 9.3,42.05 9.55,42.3 | R5.2 12.1,58.97 12.07,58.97 v11.52,58.42
  Top 0.5: IC101.2 10.73,39.72 10.35,40.1 C102.2 10.15,40.6 10.15,41.45 9.3,42.3 C101.2 9.3,42.1
  Bottom 0.2: v11.52,58.42 2.67,58.42 2.65,58.4
  Bottom 0.5: CON3.1 11.8,71.9 10.4,70.5 10.4,68.4 8.5,66.5 4.3,66.5 2.65,64.85 2.65,58.4 2.65,54.95 8.2,49.4 v8.2,45.3
  other vias: 7.7,44.8 7.2,45.8 8.2,44.8 7.2,45.3 7.7,45.3
  pour Top (no thermals): 9.65,41.9 7.5,41.9 7.5,44.6 7,44.6 7,46 9.65,46
  pour Bottom (no thermals): 8.4,44.6 6.95,44.6 6.95,46 8.4,46
VDD_3V3  (via drill 0.25, 0.25 pad 0.5)
  Top 0.15: LED2.+ 24.55,68.75 24.9,68.4 25.7,68.4 27.05,67.05 27.05,66.25 v27.1,66.25 27.55,66.25
  Top 0.152: C13.1 v11,3.2
  Top 0.2: C9.1 33.73,54.62 | 33.73,54.62 33.35,54.25 v33.25,54.25 | 33.73,54.62 33.73,54.74 IC1.48 33.57,56.64 C8.1 | R3.1 C10.1 32.9,64 32.4,63.5 32.4,63.36 32.04,63 31.26,63 30.76,63.5 29.85,63.5 IC2.4 | R2.1 28.45,65.65 28.35,65.65 27.9,66.1 27.7,66.1 27.55,66.25 | IC1.1 v25.2,64.39 v25.2,64.4 25.24,64.36 26.5,64.36 | IC1.13 20.38,59.59 18.78,61.19 C3.2 18.73,61.15 C4.2 | IC1.19 v19.28,54.3 C6.2 | IC1.32 23.45,49.28 C7.2 | D2.C v13.2,53.15 | D4.C 17.1,60.4 v17.45,60.75 17.88,60.32 C4.2 | IC1.64 27.4,63.86 26.9,64.36 26.5,64.36 | C4.2 | IC1.9 IC1.8 22.7,60.82 v22.7,60.3 | 8.35,58.06 IC7.16 | C5.2 26.5,64.36
  Top 0.3: 3.2,63.65 3.2,63.6 3.2,61.65 C16.2 | 32.5,35.1 31.8,34.4 31.8,33.1 30.9,32.2 25.2,32.2 24.5,31.5 C11.1 v23.7,31.4 | 5.25,58.45 5.68,58.03 6.4,58.03 | v9,52.8 7.5,52.8 6.4,53.9 6.4,58.03 | 8.35,58.06 C37.2 8.95,59.15 9.75,59.95 9.75,60.75 R12.1 R16.2 | 6.4,58.03 IC7.16
  Top 0.4: 5.25,58.45 5.25,59.9 4.7,60.45 IC6.5 4.14,60.45 3.1,61.5 C16.2 | IC5.5 3.2,63.65 | 3.2,63.6 C14.1
  Top 0.5: C27.2 34.38,35.1 IC3.5 32.5,35.1 32.5,37.3 32,37.8 31.25,37.8 | v24,48.4 | v24,48.4 C7.2 | v12.72,56.12 12.75,56.12 D1.C | CON2.4 30.75,39.49 | R3.1 33.4,65.4 34.3,66.3 CON11.1 | v9.5,52.8 v9,52.8
  PWR 0.2: 24,52.4 v25.1,52.4
  PWR 0.3: v11,3.2 12.2,3.2 14.89,5.89 14.89,28.2 15.9,29.2 21.5,29.2 v23.7,31.4
  PWR 0.5: 30.35,45.9 v30.35,39.85 | 30.35,45.9 25.9,45.9 24,47.8 v24,48.4 24,52.4 24,54.3 | 13.25,54.3 v19.28,54.3 24,54.3 | v13.2,53.15 13.25,53.2 13.25,54.3 | v17.45,60.75 22.25,60.75 v22.7,60.3 24,59 24,54.3 | 13.25,54.3 13.25,55.59 v12.72,56.12 | 30.35,45.9 30.35,53.35 31.25,54.25 v33.25,54.25 33.55,54.55 33.55,66.2 33.5,66.25 | CON11.1 34.75,66.25 33.5,66.25 | 33.5,66.25 v27.1,66.25 | 13.25,54.3 12.15,54.3 10.65,52.8 v9,52.8
  Bottom 0.152: 11,1.6 IC8.8 | IC11.8 IC11.7 25.8,53.58 IC11.6
  Bottom 0.2: v25.1,52.4 25.2,52.3 C29.1 25.8,52.4 25.8,53.58
  Bottom 0.3: v11,3.2 11,1.6 | v23.7,31.4 23.62,31.48 IC10.8 IC10.7
  other vias: 31.35,39.85 30.85,39.85 30.85,39.35 31.35,39.35 30.35,39.35 27.6,66.25
  pour Top (no thermals): 31.6,37.65 31.55,37.65 30.15,37.65 30.15,40.05 31.55,40.05
  pour PWR (no thermals): 30.2,39.2 31.5,39.2 31.5,40.05 30.2,40.05
  pour Top (no thermals): 27.8,66.5 26.3,66.5 26.3,65.25 26.9,65.25 26.9,66.05 27.8,66.05
VDD_5V  (via drill 0.25 pad 0.5)
  Top 0.15: L201.2 27.3,40.3 v28.4,40.3
  Top 0.3: IC3.3 31.1,33.2 31.3,33.4 31.3,34.8 31.05,35.05 30.3,35.05 IC3.1
  Top 0.5: R1.1 28.75,37.85 29.85,36.75 30.07,36.75 C26.2 30.1,36.52 30.1,35.25 IC3.1 30.15,35.2 R201.2
  other vias: 28.4,39.8 28.9,39.8 28.9,40.3
  pour Top (no thermals): 26.5,36.75 26.5,37.4 26.75,37.65 29.15,37.65 29.15,42.2 26.4,42.2 26.4,36.75
VDD_12V  (via drill 0.25 pad 0.5)
  Top 0.15: RFB102.2 5.6,33.65 6.1,33.15 6.1,31.85 CR100.1 | 20.75,37.1 L103.2
  Top 0.5: D101.A 16.1,41.15 v17.85,39.4 | RFB102.2 v4.9,33.75
  Top 1: C201.2 25.65,33.25 C104.P$2 22.25,33.25 20.5,35 20.5,36.85 20.75,37.1
  PWR 0.5: 11.8,46 6.5,51.3 6.5,58.55 12.45,64.5 14.55,64.5 15.3,65.25 15.3,66.45 CON3.6 | v17.85,39.4 17.85,42.6 14.45,46 11.8,46 | CON7.1 11.75,45.95 11.8,46 | CON6.1 11.75,29.9 | 11.75,29.9 11.75,31.7 17.85,37.8 v17.85,38.4 | v4.9,33.75 4.9,31.85 6.85,29.9 11.75,29.9
  other vias: 18.35,39.4 18.35,38.9 17.85,38.9 18.35,38.4 18.85,39.4 18.85,38.9 18.85,38.4
  pour Top (no thermals): 25.92,35.2 25.92,34.72 25.52,34.32 25.52,32.92 26.52,32.92 26.52,35.2
  pour Top (no thermals): 22.15,33.45 17.7,33.45 17.7,39.55 22.15,39.55
  pour PWR (no thermals): 19,38.25 17.7,38.25 17.7,39.55 19,39.55